# Altium PCB Board3_V2_Layout.PcbDoc
Units mil, origin at the board's own origin, x right, y up, seen from the top; angles counter-clockwise.
Board outline 3000 x 3500 mil, 2 copper layers (Top Layer, Bottom Layer); 61 components, 47 nets, 278 pads, 71 vias.
Unrouted connection lines stored in the file: 1.
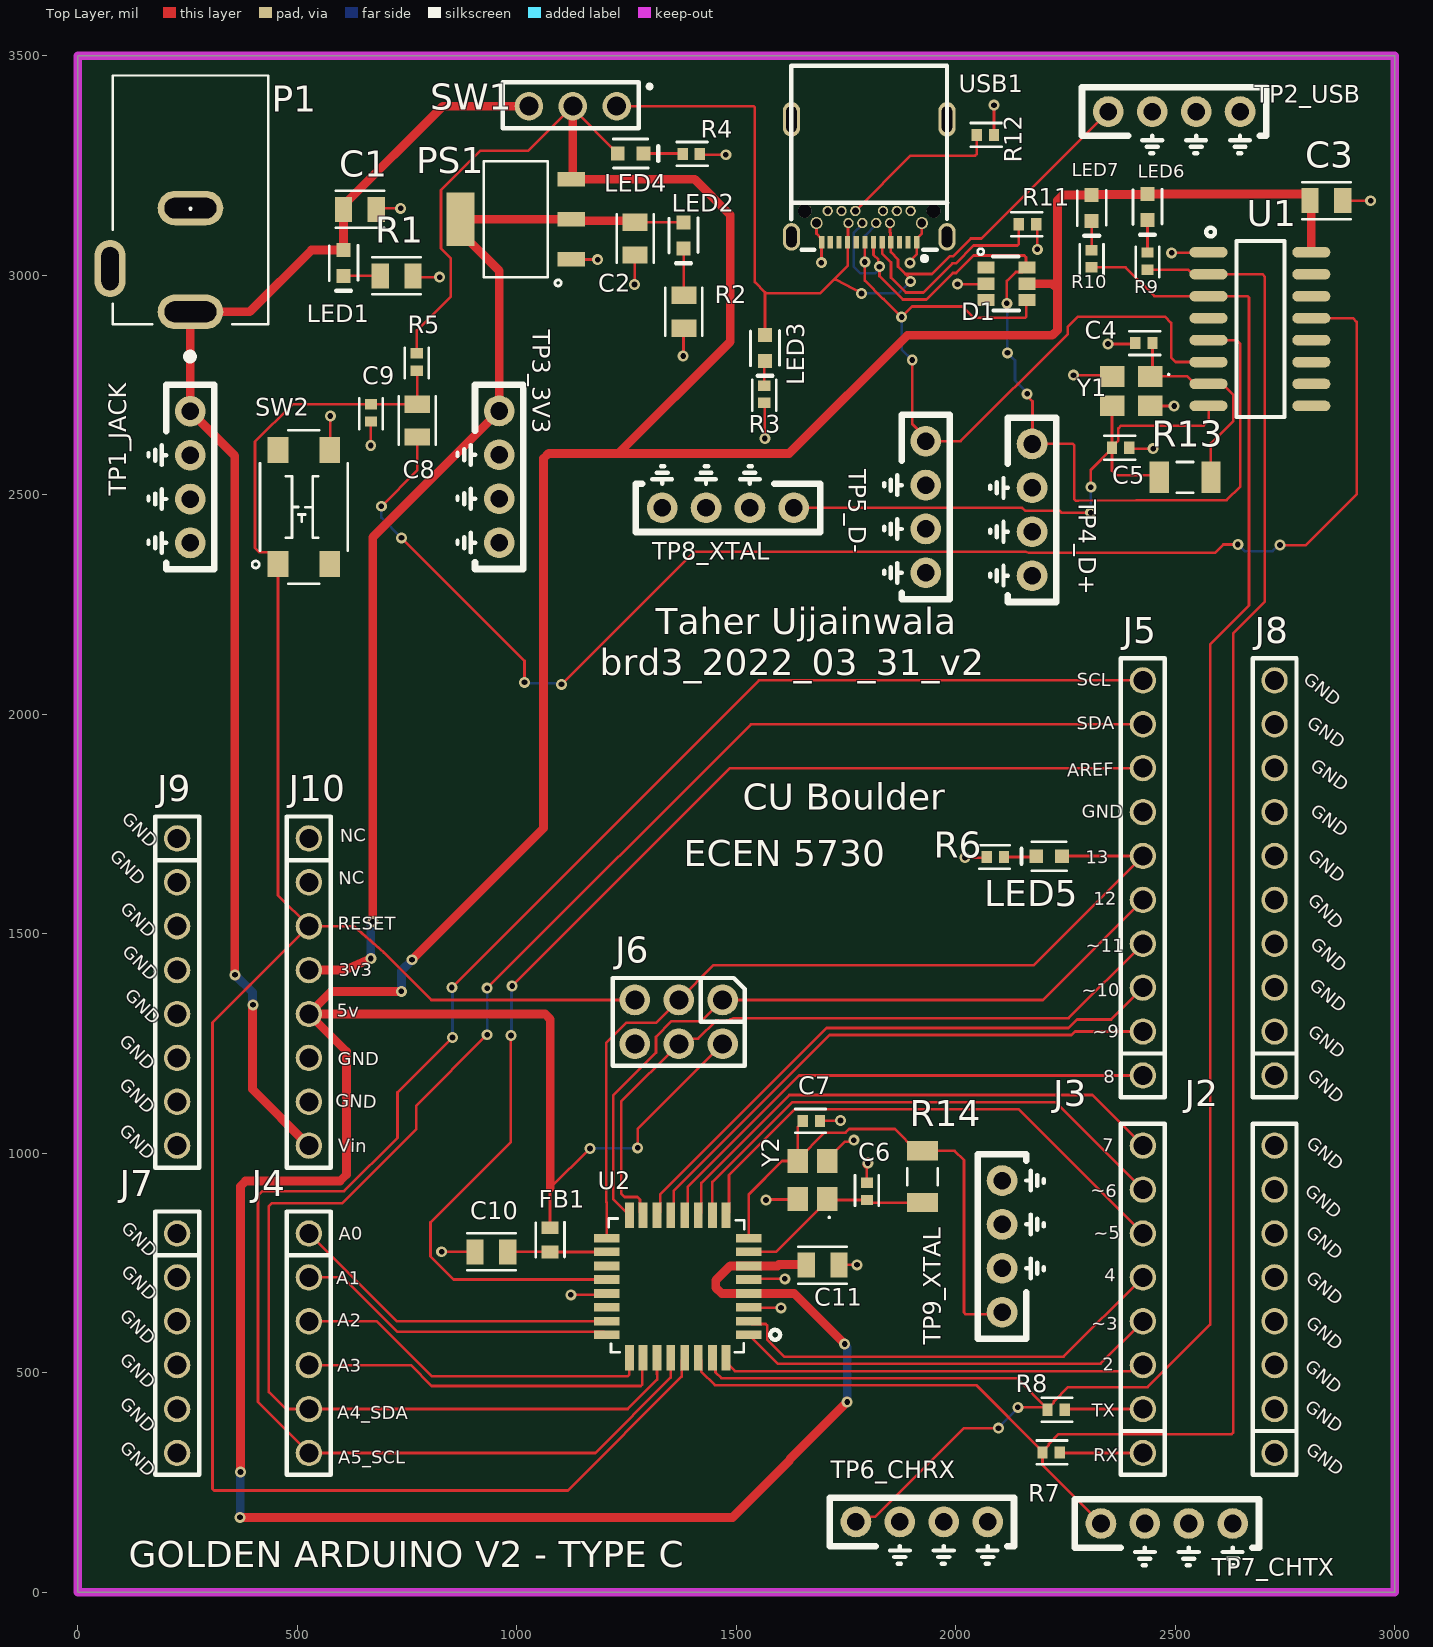
[diagram p0: Top Layer view]
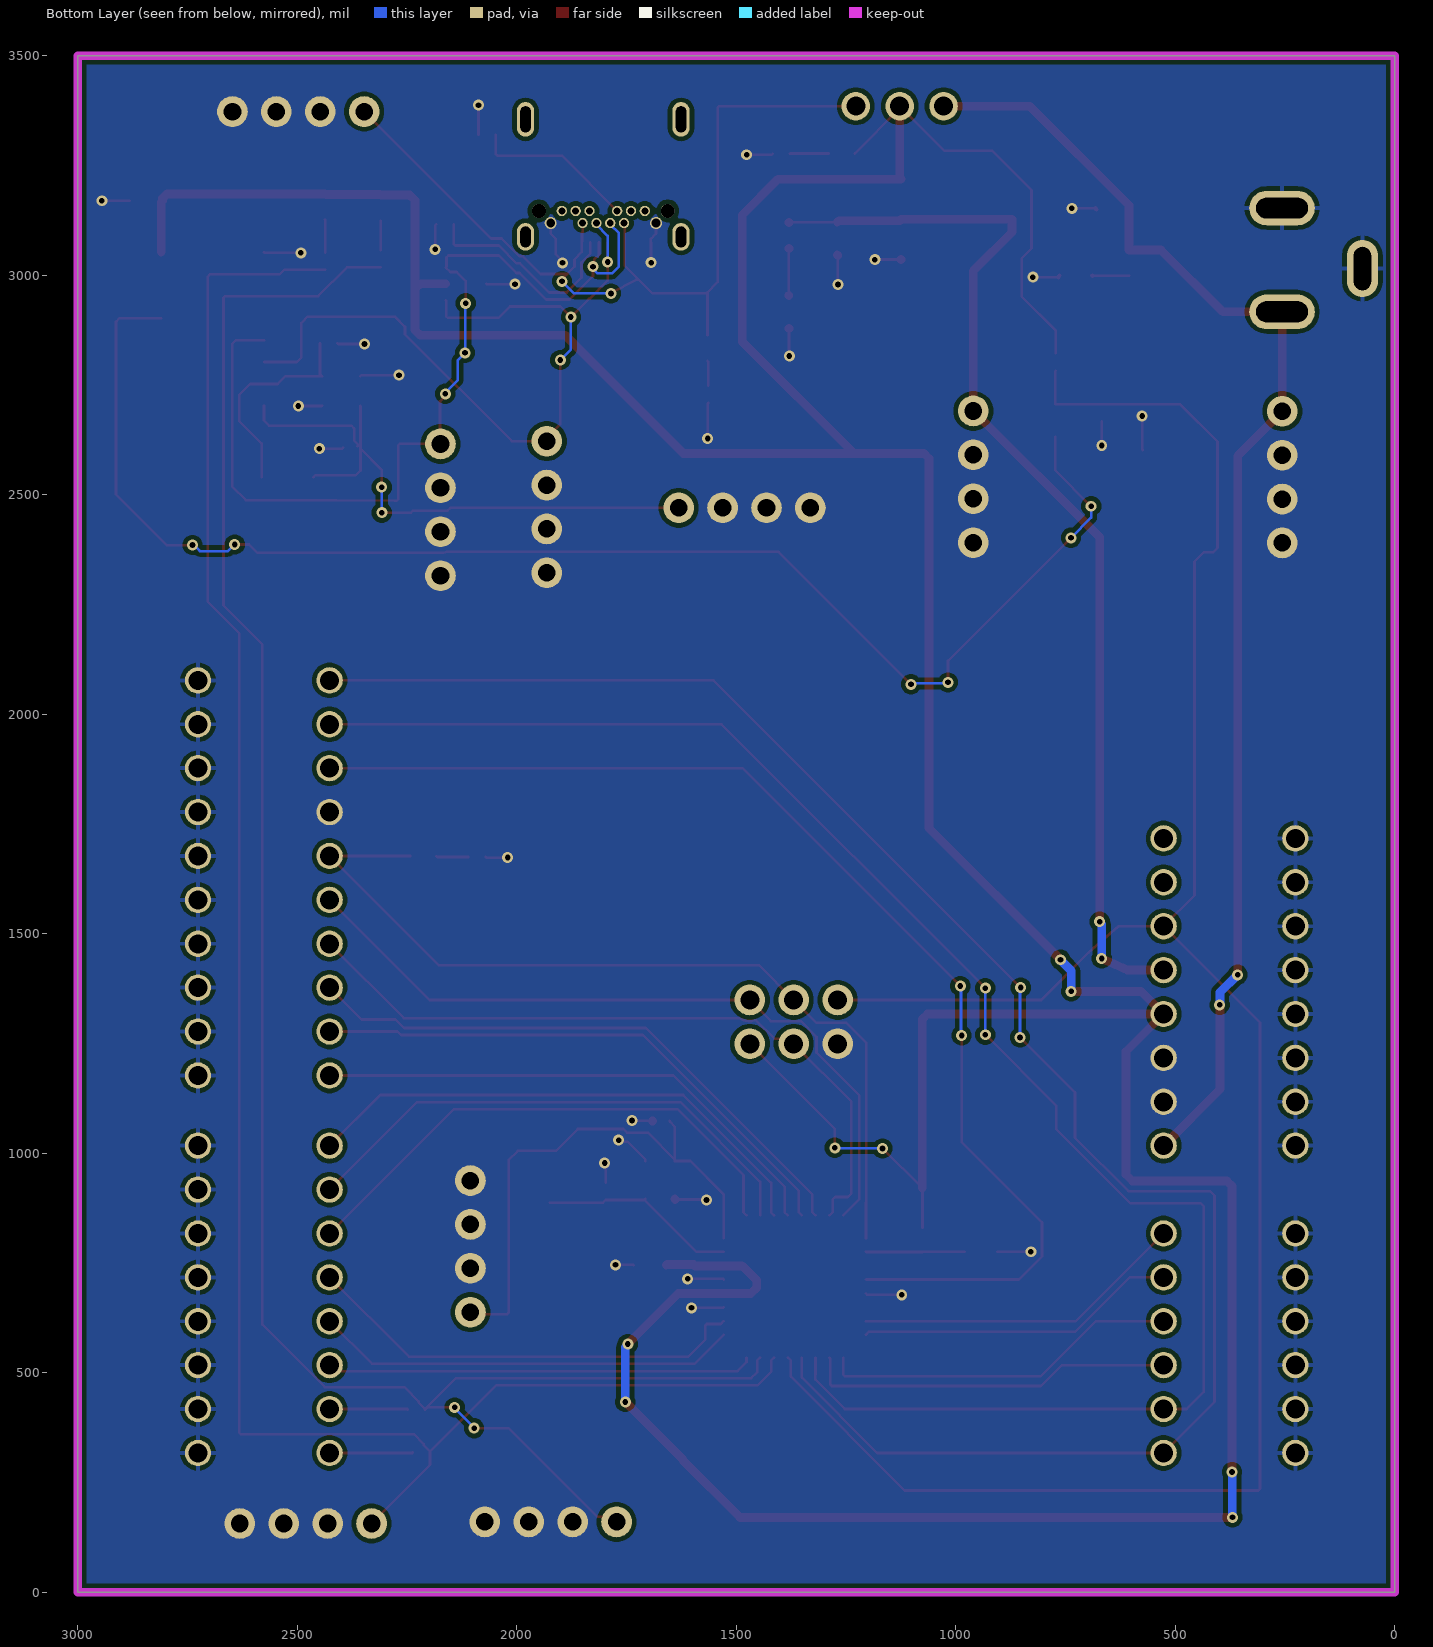
[diagram p1: Bottom Layer view, seen from below]
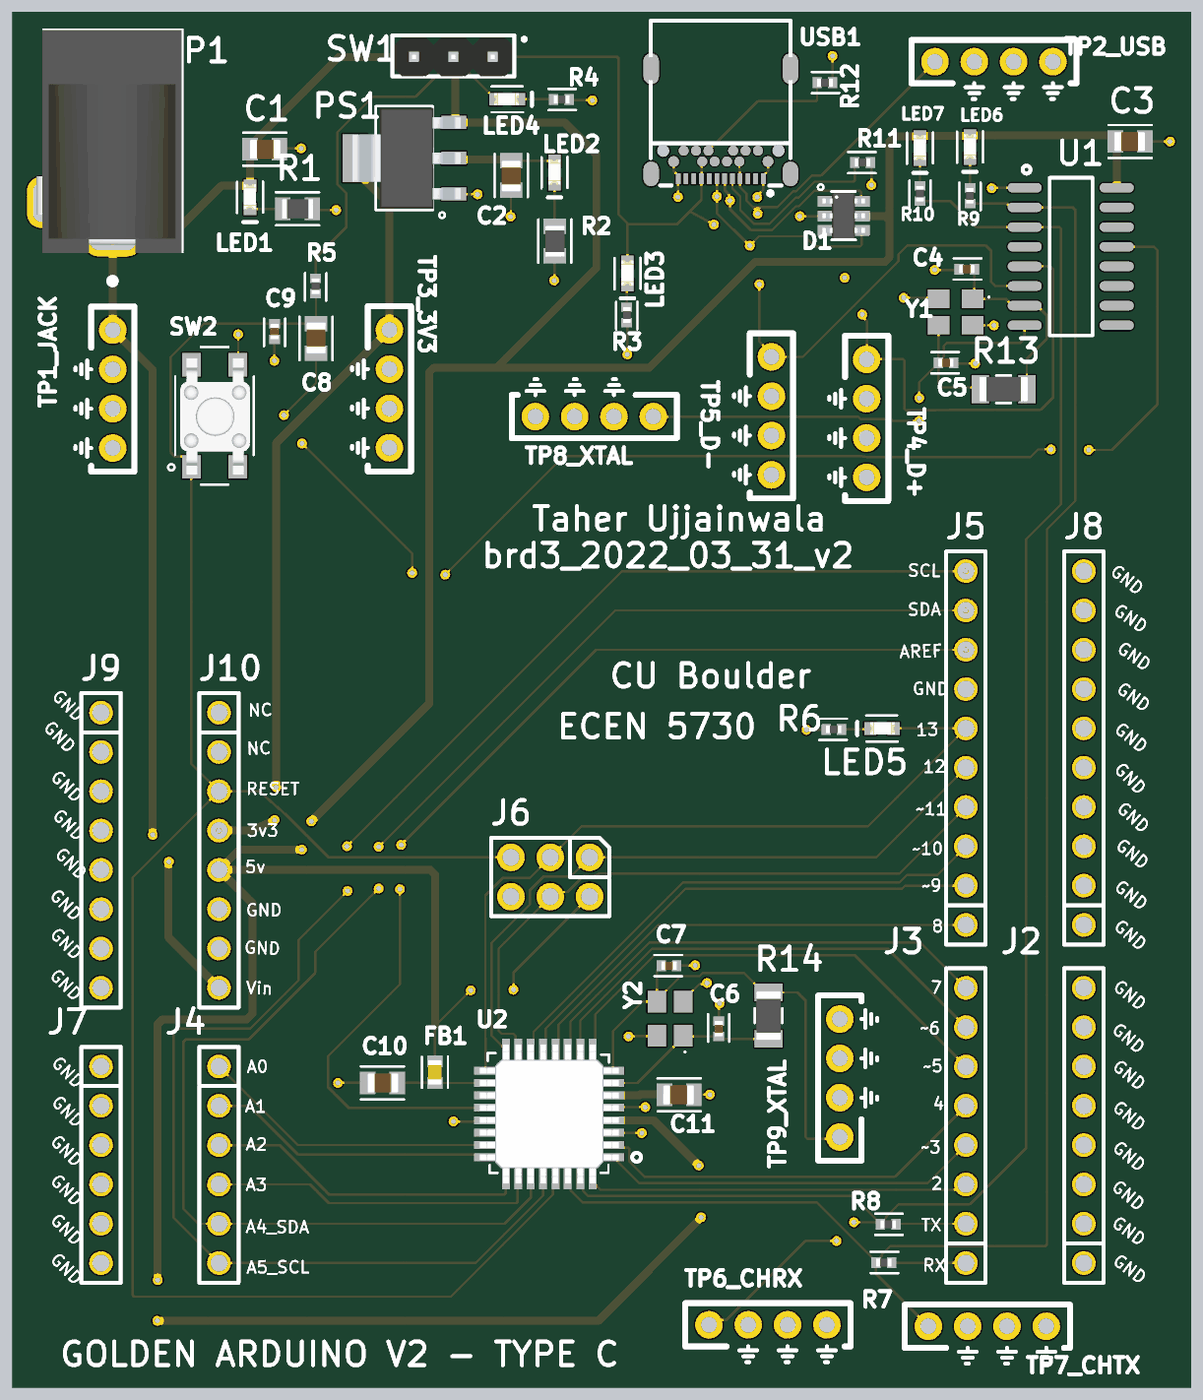
[diagram p2: 3D render of the assembled board from above, using the file's embedded part models]

## Layer stack, top to bottom
Top Solder: solder mask 0.4, Solder Resist, Dk 3.5
Top Layer: signal copper 1.4
Dielectric 1: dielectric 12.6, FR-4, Dk 4.8
Bottom Layer: signal copper 1.4
Bottom Solder: solder mask 0.4, Solder Resist, Dk 3.5

## Board outline
0,0 3000,0 3000,3500 0,3500

## Design rules (kind name [scope] priority, off if disabled: settings)
Clearance [All] p1: gap=10 ignorepadtopadclearanceinfootprint=FALSE except(0: Arc-Hole Track-Hole SMDPad-Hole THPad-Hole Via-Hole Fill-Hole Poly-Hole Region-Hole Text-Hole)
PlaneClearance [All] p1: clearance=10
PlaneConnect [All] p1: planeconnectstyle=Direct reliefexpansion=20 reliefentries=4 reliefconductorwidth=10 reliefairgap=10
PolygonConnect [All] p1: connectstyle=Direct reliefconductorwidth=10 reliefentries=4 polygonreliefangle="90 Angle" airgapwidth=10
RoutingVias [All] p1: holewidth=13 width=25 viastyle="Through Hole" minholewidth=13 minwidth=25 maxholewidth=60 maxwidth=80
SolderMaskExpansion [All] p1: expansion=4 istentingtop=FALSE
UnRoutedNet [All] p1: checkbadconnections=TRUE
Width [All] p1: maxlimit=100 minlimit=6 preferedwidth=6 minimp=50.000000 maximp=50.000000 favimp=50.000000
Width "Schematic Width Constraint" [InNet('JACK_5V')] p2: maxlimit=20 minlimit=20 preferedwidth=20 minimp=50.000000 maximp=50.000000 favimp=50.000000
Width "Schematic width constraints" [InNet('USB_5V')] p3: maxlimit=20 minlimit=20 preferedwidth=20 minimp=50.000000 maximp=50.000000 favimp=50.000000
Width "Schematics Width Constraints" [InNet('VCC_5V')] p4: maxlimit=20 minlimit=20 preferedwidth=20 minimp=50.000000 maximp=50.000000 favimp=50.000000
27 further rules are at their usual default settings.

## Components (designator, comment, footprint, x,y, rotation, side; value= is the part's Value field where it differs from the comment)
C1 "22uF" 0805_Passive_Capaciitor 642.7,3150.36 r180 top
C2 "22uF" 0805_Passive_Capaciitor 1269.76,3083.62 r90 top
C3 "22uF" 0805_Passive_Capaciitor 2844.25,3169.97 r0 top
C4 "22pF" 0402_Passive_Capacitor 2428.64,2845.58 r0 top
C5 "22pF" 0402_Passive_Capacitor 2375.66,2607.18 r180 top
C6 "22pF" 0402_Passive_Capacitor 1797.52,913.21 r90 top
C7 "22pF" 0402_Passive_Capacitor 1671.08,1073.7 r180 top
C8 "22uF" 0805_Passive_Capaciitor 773.21,2668.97 r270 top
C9 "1uF" 0402_Passive_Capacitor 667.71,2686.49 r270 top
C10 "22uF" 0805_Passive_Capaciitor 942.14,775.38 r180 top
C11 "22uF" 0805_Passive_Capaciitor 1696.84,745.04 r0 top
D1 "SRV05-4-P-T7" TVS 2114.91,2980.83 r0 top value="TVS DIODE 5.5V 6TSOP"
FB1 "FB_10uH_0603" 0603_PASSIVE_Capacitor 1075.81,802.66 r270 top
J2 "PPTC081LFBN-RC" 8_PIN_ARDUINO_100MIL 2726.35,317.18 r90 top locked value=Female
J3 "PPTC081LFBN-RC" 8_PIN_ARDUINO_100MIL 2426.35,317.18 r90 top locked value=Female
J4 "PPTC061LFBN-RC" 6_PIN_ARDUINO_100mil 526.35,817.18 r270 top locked value=Female
J5 "PPTC101LFBN-RC" 10_PIN_ARDUINO_100MIL 2426.35,1177.18 r90 top locked value=Female
J6 "NRPN032PAEN-RC" ICSP 1469.06,1349.16 r270 top
J7 "PPTC061LFBN-RC" 6_PIN_ARDUINO_100mil 226.35,817.18 r270 top locked value=Female
J8 "PPTC101LFBN-RC" 10_PIN_ARDUINO_100MIL 2726.35,1177.18 r90 top locked value=Female
J9 "PPTC081LFBN-RC" 8_PIN_ARDUINO_100MIL 226.35,1717.18 r270 top locked value=Female
J10 "PPTC081LFBN-RC" 8_PIN_ARDUINO_100MIL 526.35,1717.18 r270 top locked value=Female
LED1 "KT-0603R" LED_0603 605.37,3028.14 r270 top value=Red
LED2 "KT-0603R" LED_0603 1379.81,3090.84 r270 top value=Green
LED3 "KT-0603R" LED_0603 1565.55,2834.16 r270 top value=Red
LED4 "KT-0603R" LED_0603 1259.43,3277.39 r0 top value=Red
LED5 "KT-0603R" LED_0603 2212.81,1676.69 r180 top value=Red
LED6 "KT-0603R" LED_0603 2436.74,3155.82 r270 top value=Red
LED7 "KT-0603R" LED_0603 2309.53,3153.24 r270 top value=Red
P1 "Power Jack" Power_Jack 256.61,2916.9 r90 top value="CONN PWR JACK 2X5.5MM SOLDER"
PS1 "AMS1117-3.3" LDO 997.9,3127.59 r90 top value="IC REG LINEAR 3.3V 800MA SOT223"
R1 "1k" 0805_Passive_Resistor 726.13,2998.74 r0 top value="1K Ohm"
R2 "1k" 0805_Passive_Resistor 1380.63,2916.89 r270 top value="1K Ohm"
R3 "1k" 0402_Passive_Resistor 1563.8,2728.97 r270 top value="1K Ohm"
R4 "1k" 0402_Passive_Resistor 1397.48,3276.68 r0 top value="1K Ohm"
R5 "10k" 0402_Passive_Resistor 772.16,2802.33 r270 top value=10KOhm
R6 "1k" 0402_Passive_Resistor 2090.33,1674.74 r180 top value="1K Ohm"
R7 "1k" 0402_Passive_Resistor 2217.29,318.64 r0 top value="1K Ohm"
R8 "1k" 0402_Passive_Resistor 2228.64,415.57 r0 top value="1K Ohm"
R9 "1k" 0402_Passive_Resistor 2436.74,3032.17 r270 top value="1K Ohm"
R10 "1k" 0402_Passive_Resistor 2309.53,3037.72 r270 top value="1K Ohm"
R11 "10k" 0402_Passive_Resistor 2163.63,3116.29 r180 top value=10KOhm
R12 "10k" 0402_Passive_Resistor 2067.58,3319.84 r0 top value=10KOhm
R13 "10k" 1206_Passive_Resitor 2522.33,2539.75 r180 top value=10KOhm
R14 "10k" 1206_Passive_Resitor 1924.18,946.53 r90 top value=10KOhm
SW1 "PREC003SAAN-RC" 3_PIN_100mil 1227.63,3385.2 r180 top value="CONN HEADER VERT 3POS 2.54MM"
SW2 "TL3305AF160QG" Switch_JLC 515.02,2472.16 r90 top
TP1_JACK "TP_5V" TP10x_Probe 256.12,2540.31 r270 top (schematic designator TP1)
TP2_USB "10x Probe TP" TP10x_Probe 2497.69,3373 r0 top (schematic designator TP2)
TP3_3V3 "10x Probe TP" TP10x_Probe 959.89,2540.9 r270 top (schematic designator TP3)
TP4_D+ "10x Probe TP" TP10x_Probe 2173.83,2465.74 r270 top (schematic designator TP4)
TP5_D- "10x Probe TP" TP10x_Probe 1931.71,2472.12 r270 top (schematic designator TP5)
TP6_CHRX "10x Probe TP" TP10x_Probe 1922.71,160.02 r0 top (schematic designator TP6)
TP7_CHTX "10x Probe TP" TP10x_Probe 2480.86,156.42 r0 top (schematic designator TP7)
TP8_XTAL "10x Probe TP" TP10x_Probe 1481.13,2470.18 r180 top (schematic designator TP8)
TP9_XTAL "10x Probe TP" TP10x_Probe 2105.57,787.77 r90 top (schematic designator TP9)
U1 "CH340G" "USB to serial" 2693,2877.42 r270 top value="USB to Serial"
U2 "ATMEGA328P-ANR" ATMega328P 1364.65,696.33 r0 top value="IC MCU 8BIT 32KB FLASH 32TQFP"
USB1 "USB_TypeC" TYPE-C-TH_USB31-TYPEC-33141-2FS 1802.85,3215.33 r180 top
Y1 "X322512MSB4SI" "Crystal resonator" 2399.93,2734.2 r180 top value=12MHz
Y2 "X322516MLB4SI" "Crystal resonator" 1671.76,938.93 r90 top value=16MHz

## Footprints (in the part's own frame and the unit in brackets; to place one, negate y for a bottom-side part, rotate by r counter-clockwise, add the part's x,y. Pads: shape width x height; smd on the part's side, far side on the other; paste and mask are expansions set on the pad)
3_PIN_100mil [mm]
  round 1.65 hole 1.1: 1(0,0) 2(2.54,0) 3(5.08,0)
  silkscreen extent -2,-1.4 6.6,1.27, body extent -1.14,-1.27 6.48,1.27, height 8.38
6_PIN_ARDUINO_100mil [mil]
  round 60 hole 43.31: 1(0,0) 2(100,0) 3(200,0) 4(300,0) 5(400,0) 6(500,0)
  silkscreen extent -50,-50 550,50
8_PIN_ARDUINO_100MIL [mil]
  round 60 hole 43.31: 1(0,0) 2(100,0) 3(200,0) 4(300,0) 5(400,0) 6(500,0) 7(600,0) 8(700,0)
  silkscreen extent -50,-50 750,50
10_PIN_ARDUINO_100MIL [mil]
  round 60 hole 43.31: 1(0,0) 2(100,0) 3(200,0) 4(300,0) 5(400,0) 6(500,0) 7(600,0) 8(700,0) 9(800,0) 10(900,0)
  silkscreen extent -50,-50 950,50
0402_Passive_Capacitor [mm] "Reference: https://www.worthingtonassembly.com/perfect-0402-footprint"
  rect 0.6x0.7 smd mask+0: 1(-0.5,0) 2(0.5,0)
  silkscreen extent -0.84,-0.69 0.94,0.69, body extent -0.5,-0.27 0.5,0.28, height 0.5
0402_Passive_Resistor [mm] "Reference: https://www.worthingtonassembly.com/perfect-0402-footprint"
  rect 0.6x0.7 smd mask+0: 1(-0.5,0) 2(0.5,0)
  silkscreen extent -0.84,-0.69 0.94,0.69, body extent -0.49,-0.25 0.51,0.25, height 0.4
0603_PASSIVE_Capacitor [mm] "Reference: http://livepartlibrary.com/fpdimensions.html"
  rect 0.75x1 smd mask+0: 1(-0.7,0) 2(0.7,0)
  silkscreen extent -1.02,-0.84 1.02,0.84, body extent -0.79,-0.45 0.81,0.45, height 0.79
0805_Passive_Capaciitor [mm] "Reference: http://livepartlibrary.com/fpdimensions.html"
  rect 1x1.45 smd mask+0: 1(-0.95,0) 2(0.95,0)
  silkscreen extent -1.4,-1.07 1.4,1.07, body extent -1.04,-0.62 0.96,0.63, height 1.4
0805_Passive_Resistor [mm] "Reference: http://livepartlibrary.com/fpdimensions.html"
  rect 1x1.45 smd mask+0: 1(-0.95,0) 2(0.95,0)
  silkscreen extent -1.4,-1.07 1.4,1.07, body extent -0.98,-0.62 1.02,0.63, height 0.5
1206_Passive_Resitor [mil]
  rect 44x71 smd: 1(-59,0) 2(59,0)
  silkscreen extent -19,-35 19,35, body extent -61,-31 61,31, height 26
ATMega328P [mil]
  rect 58x20 smd mask+1: 1(163.93,-110) 2(163.93,-79) 3(163.93,-47) 4(163.93,-16) 5(163.93,16) 6(163.93,47) 7(163.93,79) 8(163.93,110) 17(-160.07,110) 18(-160.07,79) 19(-160.07,47) 20(-160.07,16) 21(-160.07,-16) 22(-160.07,-47) 23(-160.07,-79) 24(-160.07,-110)
  rect 20x58 smd mask+1: 9(111.93,162) 10(80.93,162) 11(48.93,162) 12(17.93,162) 13(-14.07,162) 14(-45.07,162) 15(-77.07,162) 16(-108.07,162) 25(-108.07,-162) 26(-77.07,-162) 27(-45.07,-162) 28(-14.07,-162) 29(17.93,-162) 30(48.93,-162) 31(80.93,-162) 32(111.93,-162)
  silkscreen extent -155,-150 235,155, body extent -175,-177 179,177, height 46
"Crystal resonator" [mil]
  rect 55.11x47.24 smd: 1(-43.3,-35.43) 2(43.31,-35.43) 3(43.32,31.5) 4(-43.3,31.5)
  silkscreen extent -87,-42 -83,-38, body extent -65,-47 65,47, height 31
ICSP [mil]
  round 70 hole 43.31: 1(0,0) 2(0,-100) 3(0,-200) 4(100,0) 5(100,-100) 6(100,-200)
  silkscreen extent -50,-250 150,50
LDO [mil]
  rect 33x63 smd: 1(-91,-126) 2(0,-126) 3(91,-126)
  rect 122x63 smd: 4(0,126)
  silkscreen extent -152,-103 132,73, body extent -128,-144 128,132, height 73
LED_0603 [mm]
  rect 0.8x0.8 smd: 1(-0.75,0) 2(0.75,0)
  silkscreen extent -1.02,-0.84 1.6,0.84, body extent -0.84,-0.41 0.76,0.39, height 0.55
Power_Jack [mm]
  oval 2x3.8 hole 1.2 slot 3 at 90 deg: 1(0,0) 2(6,0)
  oval 3.3x1.8 hole 1 slot 2.5 at 0 deg: 3(2.5,4.65)
  silkscreen extent -2.79,-4.5 13.68,4.5, body extent -0.76,-4.45 13.64,4.95, height 11.49
Switch_JLC [mm]
  rect 1.5x1.2 smd: 1(-3.3,1.5) 2(3.3,1.5) 3(-3.3,-1.5) 4(3.3,-1.5)
  silkscreen extent -4.44,-2.54 4.45,3, body extent -3.8,-2.29 3.7,2.21, height 3.7
TP10x_Probe [mil] "Small Probs footprint"
  round 70 hole 40: 1(-150,0) 2(-50,0) 2(50,0) 2(150,0)
  silkscreen extent -210,-95 210,55
TVS [mm]
  rect 1x0.7 smd mask+0.025: 1(-1.162,0.95) 2(-1.162,0) 3(-1.162,-0.95) 4(1.2,-0.95) 5(1.2,0) 6(1.2,0.95)
  silkscreen extent -1.65,-1.55 0.76,2.03, body extent -1.37,-1.44 1.38,1.46, height 1.1
TYPE-C-TH_USB31-TYPEC-33141-2FS [mm]
  rect 0.3x0.7 smd: A1(-2.75,3.555) A2(-2.25,3.555) A3(-1.75,3.555) A4(-1.25,3.555) A5(-0.75,3.555) A6(-0.25,3.555) A7(0.25,3.555) A8(0.75,3.555) A9(1.25,3.555) A10(1.75,3.555) A11(2.25,3.555) A12(2.75,3.555)
  round 0.7 hole 0.5: B1(3.05,2.445) B12(-3.05,2.445)
  round 0.6 hole 0.4: B2(2.4,1.745) B3(1.6,1.745) B4(1.2,2.445) B5(0.8,1.745) B6(0.4,2.445) B7(-0.4,2.445) B8(-0.8,1.745) B9(-1.2,2.445) B10(-1.6,1.745) B11(-2.4,1.745)
  oval 1x1.6 hole 0.6 slot 1.2 at 90 deg: EH(-4.5,3.245) EH(4.5,3.245)
  oval 1x2 hole 0.6 slot 1.5 at 90 deg: EH(-4.5,-3.555) EH(4.5,-3.555)
  round 0.8 hole 0.8 unplated: ""(-3.725,1.745) ""(3.725,1.745)
  silkscreen extent -4.52,-6.65 4.52,4.64
"USB to serial" [mil]
  oval 24x86.61 smd: 1(-175,-117) 2(-125,-117) 3(-75,-117) 4(-25,-117) 5(25,-117) 6(75,-117) 7(125,-117) 8(175,-117) 9(175,117) 10(125,117) 11(75,117) 12(25,117) 13(-25,117) 14(-75,117) 15(-125,117) 16(-175,117)
  silkscreen extent -231,-122 201,56

## Part data
C1 C2 C3 C8 C10 C11: library part C_22uF_0805, "MULTILAYER CERAMIC CAPACITORS MLCC - SMD/SMT 22UF 25V 0805 ROHS", LCSC Part#=C45783, MFR Part #=CL21A226MAQNNNE, Datasheet=https://datasheet.lcsc.com/szlcsc/Samsung-Electro-Mechanics-CL21A226MAQNNNE_C45783.pdf, Type=Basic
C4 C5 C6 C7: library part C_22pF_0402, "MULTILAYER CERAMIC CAPACITORS MLCC - SMD/SMT 22PF 50V 0402 ROHS", LCSC Part#=C1555, MFR Part #=0402CG220J500NT, Datasheet=https://datasheet.lcsc.com/szlcsc/Guangdong-Fenghua-Advanced-Tech-0402CG220J500NT_C1555.pdf, Type=Basic
C9: library part C_1uF_0402, "MULTILAYER CERAMIC CAPACITORS MLCC - SMD/SMT 1UF 25V 0402 ROHS", LCSC Part#=C52923, MFR Part #=CL05A105KA5NQNC, Datasheet=https://datasheet.lcsc.com/szlcsc/Samsung-Electro-Mechanics-CL05A105KA5NQNC_C52923.pdf, Type=Basic
D1: library part D_TVS_Diode, "TVS SOT-23-6 ROHS", LCSC Part#=C85364, Datasheet=https://datasheet.lcsc.com/szlcsc/ProTek-Devices-SRV05-4-P-T7_C85364.pdf, MFR Part #=SRV05-4-P-T7, Type=Basic
FB1: "10 uH, 30 Q, 1.85 Ohm Series Resistance, 17MHz Self Resonant Frequency,Inductor , SMD 0603, 3 Amps rated current", LCSC Part#=C1035, MFR Part #=SDFL1608S100KTF, Datasheet=https://datasheet.lcsc.com/szlcsc/Sunlord-SDFL1608S100KTF_C1035.pdf, Type=Basic
J2 J3 J9 J10: library part JF_8_PIN_FEMALE_ARDUINO, "8 Position Header Connector 0.100\" (2.54mm) Through Hole Tin", LCSC Part#=C27438, Digikey Link=https://www.digikey.com/product-detail/en/PPTC081LFBN-RC/S7006-ND/810147/?itemSeq=304982354, Digikey Part=S7006-ND, Type=Extended
J4 J7: library part JF_6_PIN_FEMALE_ARDUINO, "6 Position Header Connector 0.100\" (2.54mm) Through Hole Tin", LCSC Part#=C40877, Digikey Link=https://www.digikey.com/product-detail/en/PPTC061LFBN-RC/S7004-ND/810145/?itemSeq=304982353, Digikey Part=S7004-ND, Type=Extended
J5 J8: library part JF_10_PIN_FEMALE_ARDUINO, "10 Position Header Connector 0.100\" (2.54mm) Through Hole Tin", LCSC Part#=C225507, Digikey Link=https://www.digikey.com/product-detail/en/PPTC101LFBN-RC/S7008-ND/810149/?itemSeq=304982352, Digikey Part=S7008-ND, Type=Extended
J6: library part J_ICSP, "Connector Header Through Hole 6 position 0.079\" (2.00mm)", LCSC Part#=C124384, Digikey Link=https://www.digikey.com/product-detail/en/NRPN032PAEN-RC/S5801-03-ND/804955/?itemSeq=304982355, Digikey Part=S5801-03-ND, Type=Extended
LED1 LED3 LED4 LED5 LED6 LED7: library part LED_RED_0603, "LIGHT EMITTING DIODES (LED) RED 520~625NM 90~100MCD@20MA TOP VIEW 0603 ROHS", LCSC Part#=C2286, Datasheet=https://datasheet.lcsc.com/szlcsc/Everlight-Elec-19-217-BHC-ZL1M2RY-3T_C72041.pdf, MFR Part #=KT-0603R, Type=Basic
LED2: library part LED_GREEN_0603, "LIGHT EMITTING DIODES (LED) GREEN 520~535NM 112~258MCD@20MA TOP VIEW 0603 ROHS", LCSC Part#=C72043, MFR Part #=19-217/GHC-YR1S2/3T, Type=Basic
P1: library part "P_Power Jack", "Power Barrel Connector Jack 2.10mm ID (0.083\"), 5.50mm OD (0.217\") Through Hole, Right Angle", LCSC Part#=C136744, Digikey Link=https://www.digikey.com/product-detail/en/PJ-102A/CP-102A-ND/275425/?itemSeq=304982367, Digikey Part=CP-102A-ND, Type=Extended
PS1: library part PS_AMS_LDO_3v3, "LOW DROPOUT REGULATORS(LDO) POSITIVE FIXED 1.3V @ 800MA 15V 3.3V 1A SOT-223 ROHS", LCSC Part#=C6186, MFR Part #=AMS1117-3.3, Type=Basic
R1 R2: library part R_1K_0805, "CHIP RESISTOR - SURFACE MOUNT 1KOHMS ±1% 1/8W 0805 ROHS", LCSC Part#=C17513, MFR Part #=0805W8F1001T5E, Type=Basic
R3 R4 R6 R7 R8 R9 R10: library part R_1K_0402, "1 kOhms chip resistor SURFACE MOUNT 1KOHMS ±1% 1/16W 0402 ROHS", LCSC Part#=C11702, MFR Part #=0402WGF1001TCE, Datasheet=https://datasheet.lcsc.com/szlcsc/Uniroyal-Elec-0402WGF1001TCE_C11702.pdf, Type=Basic
R5 R11 R12: library part R_10KOhm_0402, "CHIP RESISTOR - SURFACE MOUNT 10KOHMS ±1% 1/16W 0402 ROHS", LCSC Part#=C25744, MFR Part #=0402WGF1002TCE, Datasheet=https://datasheet.lcsc.com/szlcsc/Uniroyal-Elec-0402WGF1002TCE_C25744.pdf, Type=Basic
R13 R14: library part R_10KOhm_1206, "10 kOhms ±5% 0.25W, 1/4W Chip Resistor 1206 (3216 Metric) Automotive AEC-Q200 Thick Film", LCSC Part#=C17902, Digikey Link=https://www.digikey.com/product-detail/en/RMCF1206JT300R/RMCF1206JT300RCT-ND/1942776/?itemSeq=304982374, Digikey Part=RMCF1206JT300RCT-ND, Type=Basic
SW1: library part SW_3Pin_100mil_Switch, "Connector Header Through Hole 3 position 0.100\" (2.54mm)", LCSC Part#=C429954, Digikey Link=https://www.digikey.com/product-detail/en/PREC003SAAN-RC/S1012EC-03-ND/2774851/?itemSeq=304982371, Digikey Part=S1012EC-03-ND, Type=Extended
SW2: library part SW_Push_Button_JLC, "Tactile Switch SPST-NO Top Actuated Surface Mount", LCSC Part#=C174049, MFR Part #=C174049, Type=Extended
TP1_JACK TP2_USB TP3_3V3 TP4_D+ TP5_D- TP6_CHRX TP7_CHTX TP8_XTAL TP9_XTAL: library part TP_10x_Probe, "Test Point 300 mil centers"
U1: library part U_USBtoSerial, "Transceiver USB 2.0 2Mbps SOP-16_150mil USB ICs RoHS", LCSC Part#=C14267, Datasheet=https://datasheet.lcsc.com/lcsc/2008191806_WCH-Jiangsu-Qin-Heng-CH340G_C14267.pdf, MFR Part #=CH340G, Type=Basic
U2: library part U_ATMega328P, "AVR AVR® ATmega Microcontroller IC 8-Bit 20MHz 32KB (16K x 16) FLASH 32-TQFP (7x7)", LCSC Part#=C14877, MFR Part #=ATMEGA328P-AU, Digikey Link=https://www.digikey.com/product-detail/en/ATMEGA328P-ANR/ATMEGA328P-ANRCT-ND/2774230/?itemSeq=304982365, Type=Basic
USB1: library part USB_TypeC3.1
Y1: library part X_12MHz_Res, "SMD Crystal Resonators 12MHz ±10ppm SMD-3225_4P RoHS", LCSC Part#=C9002, Datasheet=https://datasheet.lcsc.com/szlcsc/Yangxing-Tech-X322512MSB4SI_C9002.pdf, MFR Part #=X322512MSB4SI, Type=Basic
Y2: library part X_16Mhz_Res, "±10ppm 16000000Hz -40℃~85℃ 贴片无源晶振 60Ω 9pF SMD3225-4P Crystals ROHS", LCSC Part#=C13738, MFR Part #=X322516MLB4SI, Type=Basic

## Via types
v1: diameter 25, hole 13, Top Layer to Bottom Layer, 71 vias

## Nets (pads, with @x,y where several pads share a name; then routed paths per layer and width w, separated by ;. In a path a pad name is that pad's centre, name@x,y a point inside that pad or via, vN(x,y) a via of type N, cw(c..) or ccw(c..) an arc to the next point about the centre after c; other vN are vias at no path point)
3V3: C2.2 J10.4 LED2.1 PS1.2 PS1.4 TP3_3V3.1 | length 2499.2
  Top Layer w6: C2.2@1270.08,3120.69 LED2.1@1379.48,3120.69
  Top Layer w20: v1(526.35,1417.18) 600.2,1417.18 608.49,1417.18 v1(667.55,1443.68) ; v1(671.96,1527.49) 671.96,2402.97 TP3_3V3.1 959.89,3010.1 871.9,3098.09 PS1.4 PS1.2 1127.19,3124.31 1266.47,3124.31 C2.2 C2.2@1270.08,3120.69 ; LED2.1@1379.48,3120.69 LED2.1
  Bottom Layer w20: v1(667.55,1443.68) 667.55,1521.73 671.96,1526.14 v1(671.96,1527.49)
A0: J4.1 U2.23 | length 761
  Top Layer w6: J4.1 726.19,617.33 U2.23
A1: J4.2 U2.24 | length 732.4
  Top Layer w6: J4.2 603.72,717.18 727.57,593.33 1197.58,593.33 U2.24
A2: J4.3 U2.25 | length 822.5
  Top Layer w6: J4.3 681.09,617.18 806.61,491.66 1252.44,491.66 1255.96,495.17 1255.96,533.71 U2.25
A3: J4.4 U2.26 | length 842.6
  Top Layer w6: J4.4 758.46,517.18 806.01,469.63 1282.34,469.63 1285.85,473.15 1285.85,532.61 U2.26
A4_SDA: J4.5 J5.9 U2.27 | length 3940.9
  Top Layer w6: v1(932.5,1269.91) 771.09,1108.5 771.09,1055.36 601.63,885.9 441.64,885.9 435.24,879.5 435.24,456.05 474.12,417.18 J4.5 1252.51,417.18 1319.67,484.34 1319.67,496.23 1319.58,496.33 U2.27 ; v1(932.5,1375.98) 1533.69,1977.18 v1(2426.35,1977.18)
  Bottom Layer w6: v1(932.5,1269.91) v1(932.5,1375.98)
A5_SCL: J4.6 J5.10 U2.28 | length 4210.7
  Top Layer w6: v1(852,1377.33) 1551.85,2077.18 v1(2426.35,2077.18) ; v1@852.49,1259.84 853.5,1260.86 v1(853.5,1263.82) 728.28,1138.59 728.28,1035.17 606.68,913.58 420.81,913.58 410.43,903.2 410.43,433.1 J4.6 1179.03,317.18 1350.58,488.72 U2.28
  Bottom Layer w6: v1(852,1377.33) 853.5,1375.82 v1(853.5,1263.82)
AREF: J5.8 U2.20 | length 2758.4
  Top Layer w6: v1(986.63,1268.2) 986.63,1025.79 803.37,842.53 803.37,764.95 855.99,712.33 U2.20 ; v1(989.57,1380.9) 1485.85,1877.18 v1(2426.35,1877.18)
  Bottom Layer w6: v1(986.63,1268.2) 988.1,1269.67 988.1,1379.42 v1(989.57,1380.9)
CH340_RX: R8.1 R10.2 TP6_CHRX.1 U1.3 U2.31 | length 4590.6
  Top Layer w6: U2.31 1452.58,527.33 1452.58,500.95 1466.03,487.49 2139,487.49 2208.96,417.54 2223.52,432.1 2223.52,434.73 2255.83,467.05 2437.03,467.05 2579.59,609.6 2579.59,2159.07 2668.17,2247.66 2668.17,2948.91 2664.65,2952.42 U1.3 2452.83,2952.42 2387.21,3018.04 R10.2 ; TP6_CHRX.1 1784.59,171.9 1816.71,171.9 2018.38,373.57 v1(2097.2,373.57) ; v1(2141.51,420.96) 2203.57,420.96 R8.1
  Bottom Layer w6: v1(2097.2,373.57) 2097.2,375.11 2141.51,419.42 v1(2141.51,420.96)
CH340_TX: R7.1 R9.2 TP7_CHTX.1 U1.2 U2.30 | length 4497.7
  Top Layer w6: U2.30 1420.58,527.33 1420.58,501.95 1451.03,471.49 2046.73,471.49 R7.1@2197.61,320.61 ; TP7_CHTX.1 2197.61,289.67 R7.1@2197.61,320.61 ; R9.2 2529.76,3012.49 2539.82,3002.42 U1.2 2698.41,3002.42 2704.35,2996.48 2704.35,2256.39 2632.61,2184.65 2632.61,364.16 2628.63,360.18 2234.54,360.18 2212.17,337.8 2212.17,335.16 R7.1@2197.61,320.61
D+: D1.6 TP4_D+.1 U1.5 USB1.A6 USB1.B6 | length 2153.7
  Top Layer w6: USB1.A6 1812.7,3046.64 1823.82,3035.52 1823.82,3022.23 v1(1826.37,3019.67) ; v1@1823.69,3016.99 1826.37,3014.31 1826.37,2998.03 1879.59,2944.81 1932.95,2944.81 1993.48,3005.34 2001.08,3005.34 2040.75,3045.01 2156.08,3045.01 2160.08,3041.01 2160.08,3020.3 D1.6 2151.53,3007.61 2137.09,3007.61 2116.44,2986.96 v1(2116.44,2936.07) ; v1(2162.79,2730.01) 2162.79,2724.87 2174.83,2712.83 2174.83,2616.74 TP4_D+.1 ; TP4_D+.1@2174.2,2616.11 2266.86,2616.11 2270.38,2612.6 2270.38,2489.7 2272.13,2487.94 2273.89,2486.18 2278.86,2486.18 2411.49,2487.24 cw(c2411.69,2461.74) 2411.6,2487.24 2617.03,2487.94 2648.31,2519.22 2648.31,2843.82 2639.71,2852.42 U1.5
  Bottom Layer w6: USB1.B6 1787.11,3115.47 1767.51,3095.87 1767.51,3019.7 1782.45,3004.77 1816.93,3004.77 1823.94,3011.77 1823.94,3017.24 v1(1826.37,3019.67) ; v1(2116.44,2936.07) 2117.16,2935.35 2117.16,2824.17 2134.89,2806.44 2134.89,2760.81 2162.79,2732.91 v1(2162.79,2730.01)
  other v1: 2117.89,2823.45
D-: D1.4 TP5_D-.1 U1.6 USB1.A7 USB1.B7 | length 1814.6
  Top Layer w6: USB1.A7 v1(1793.01,3030.27) 1793.01,2987.65 1834.36,2946.3 1835.35,2946.3 v1(1876.73,2904.92) 1900.62,2928.81 2015.86,2928.81 2041.53,2903.14 2157.25,2903.14 2160.77,2906.66 2160.77,2942.04 D1.4 ; v1(1900.93,2806.84) 1900.93,2660.83 1931.71,2630.05 TP5_D-.1 2011.2,2622.12 2254.76,2865.68 2254.76,2882.41 2278,2905.65 2476.35,2905.65 2490.66,2891.34 2490.66,2812.4 2500.63,2802.42 U1.6
  Bottom Layer w6: v1(1793.01,3030.27) 1793.01,3089.88 1818.61,3115.48 USB1.B7 ; v1(1876.73,2904.92) 1876.73,2831.03 v1(1900.93,2806.84)
DIO2: J3.3 U2.32 | length 974.2
  Top Layer w6: U2.32 1476.58,524.18 1497.26,503.49 2398.05,503.49 2411.73,517.18 J3.3
DIO3: J3.4 U2.1 | length 964.9
  Top Layer w6: U2.1 1594.22,520.68 2329.85,520.68 J3.4
DIO4: J3.5 U2.2 | length 1024.7
  Top Layer w6: U2.2 1535.02,610.89 1567.06,610.89 1570.58,607.37 1570.58,575.33 1609.22,536.68 2245.85,536.68 J3.5
DIO5: J3.6 U2.9 | length 1216.9
  Top Layer w6: U2.9 1483.58,865.33 1483.58,949.85 1634.2,1100.48 2143.05,1100.48 J3.6
DIO6: J3.7 U2.10 | length 1214.9
  Top Layer w6: U2.10 1445.58,934.48 1627.57,1116.48 2227.05,1116.48 J3.7
DIO7: J3.8 U2.11 | length 1213.2
  Top Layer w6: U2.11 1420.58,865.33 1420.58,932.11 1620.94,1132.48 2311.05,1132.48 J3.8
DIO8: J5.1 U2.12 | length 1210.1
  Top Layer w6: U2.12 1389.58,865.33 1389.58,923.74 1643.02,1177.18 J5.1
DIO9: J5.2 U2.13 | length 1278
  Top Layer w6: U2.13 1357.58,865.33 1357.58,914.36 1712.38,1269.16 2263.59,1269.16 2271.6,1277.18 J5.2
DIO10_SS: J5.3 U2.14 | length 1345.5
  Top Layer w6: U2.14 1326.58,865.33 1326.58,905.99 1705.75,1285.16 2256.96,1285.16 2276.53,1304.73 2353.9,1304.73 J5.3
DIO11_MOSI: J5.4 J6.5 U2.15 | length 1633.9
  Top Layer w6: U2.15 1280.58,865.33 1280.58,894.57 1274.81,900.33 1245.58,900.33 1237.7,908.2 1237.7,1117.81 J6.5 1380.94,1261.05 1413.06,1261.05 1454.53,1302.52 1457.02,1302.52 1457.71,1302.52 ccw(c1469.06,1349.16) 1493.32,1307.75 2256.92,1307.75 J5.4
DIO12_MISO: J5.5 J6.1 U2.16 | length 1700.7
  Top Layer w6: U2.16 1219.95,894.95 1219.95,1132.18 1317.06,1229.28 1317.06,1265.05 1352.99,1300.98 1420.87,1300.98 J6.1 2198.33,1349.16 J5.5
DIO13_SCK: J5.6 J6.2 LED5.1 U2.17 | length 2028.6
  Top Layer w6: U2.17 1204.58,887.7 1203.95,888.32 1203.95,1251.94 1249.17,1297.16 1317.06,1297.16 J6.2 1448.5,1428.61 2177.78,1428.61 J5.6 2242.82,1677.18 LED5.1
DTR: C8.2 U1.13 | length 3317.9
  Top Layer w6: v1(691.56,2473.86) 773.21,2555.51 C8.2 ; v1(737.58,2401.91) 1017.6,2121.89 v1(1017.6,2072.63) ; v1(1101.86,2068.09) 1403.89,2370.12 2158.92,2370.12 ccw(c2173.83,2415.74) 2173.83,2367.74 2590.94,2367.74 2609.81,2386.61 v1(2642.67,2386.61) ; v1(2738.77,2385.43) 2797.46,2385.43 2913.17,2501.15 2913.17,2894.13 2904.88,2902.42 U1.13
  Bottom Layer w6: v1(691.56,2473.86) 691.56,2447.93 v1(737.58,2401.91) ; v1(1017.6,2072.63) 1019.87,2070.36 1099.59,2070.36 v1(1101.86,2068.09) ; v1(2642.67,2386.61) 2643.17,2386.61 2658.12,2371.66 2722.14,2371.66 2735.9,2385.43 v1(2738.77,2385.43)
GND: C1.1 C2.1 C3.2 C4.1 C5.1 C6.2 C7.1 C9.2 C10.2 C11.2 D1.2 J2.1 J2.2 J2.3 J2.4 J2.5 J2.6 J2.7 J2.8 J5.7 J6.6 J7.1 J7.2 J7.3 J7.4 J7.5 J7.6 J8.1 J8.2 J8.3 J8.4 J8.5 J8.6 J8.7 J8.8 J8.9 J8.10 J9.1 J9.2 J9.3 J9.4 J9.5 J9.6 J9.7 J9.8 J10.6 J10.7 P1.2 P1.3 PS1.1 R1.2 R2.2 R3.2 R4.2 R6.2 R11.1 R12.2 SW2.4 TP1_JACK.2 TP2_USB.2 TP3_3V3.2 TP4_D+.2 TP5_D-.2 TP6_CHRX.2 TP7_CHTX.2 TP8_XTAL.2 TP9_XTAL.2 U1.1 U2.3 U2.5 U2.21 USB1.A1 USB1.A12 USB1.B1 USB1.B12 Y1.2 Y1.4 Y2.2 Y2.4 | length 2039.8
  Top Layer w6: SW2.4 575.24,2603.24 v1(575.24,2679.49) ; v1(667.35,2612.37) 667.35,2666.45 C9.2 ; C1.1@682.17,3152.43 v1(735.46,3152.43) ; R1.2@766.66,2995.62 v1(824.46,2995.62) ; v1(828.87,775.52) 904.6,775.52 C10.2 ; v1(1122.99,677.37) 1201.62,677.37 U2.21 ; PS1.1@1124.4,3036.1 v1@1183.85,3036.1 ; v1@1268.93,2979.76 C2.1@1268.93,3045.4 ; v1@1379.81,2817.14 R2.2@1379.81,2878.67 ; R4.2 1419.21,3274.63 v1(1476.16,3274.63) ; U2.3 1530.08,647.83 v1(1601.9,647.83) ; U2.5 1530.08,713.83 v1(1610.75,713.83) ; R3.2 1565.04,2708.05 v1(1565.04,2628.16) ; v1@1568.78,894.46 Y2.4@1639.1,894.46 ; USB1.B1 1682.78,3095.05 1694.59,3083.24 USB1.A12 1694.25,3075.02 1694.25,3029.07 v1(1693.91,3028.73) ; C7.1@1691.17,1074.11 v1@1737.25,1074.11 ; Y2.2 1707.19,986.18 1747.01,1025.99 1764.16,1025.99 v1(1767.79,1029.62) ; C11.2 1734.84,745.65 v1(1774.96,745.65) ; C6.2 v1@1797.52,973.98 ; v1(1895.67,3028.55) 1895.67,3032.29 1911.12,3047.74 USB1.A1 1911.12,3083.24 1922.94,3095.05 USB1.B12 ; v1(2004.04,2979.84) 2068.15,2979.84 D1.2 ; v1(2020.87,1673.51) 2069.42,1673.51 R6.2 ; v1(2087.17,3387.52) 2087.17,3319.92 R12.2 ; R11.1 2185.98,3113.63 v1(2185.98,3059.23) ; v1(2268.22,2772.4) 2353.85,2772.4 Y1.2 ; v1(2346.87,2843.53) 2406.91,2843.53 C4.1 ; C5.1 2397.39,2605.12 v1(2449.73,2605.12) ; Y1.4 2443.76,2702.18 v1(2497.59,2702.18) ; v1(2491.85,3051.14) 2492.49,3051.78 2575.36,3051.78 U1.1 ; C3.2 2881.8,3169.82 v1(2945.27,3169.82)
  Top Layer w10: C1.1 C1.1@682.17,3152.43 ; R1.2 R1.2@766.66,2995.62
  Top Layer w20: PS1.1 PS1.1@1124.4,3036.1 ; v1@1183.85,3036.1 v1(1184.34,3035.61) ; v1(1268.11,2978.94) v1@1268.93,2979.76 ; C2.1@1268.93,3045.4 C2.1 ; v1(1378.99,2816.32) v1@1379.81,2817.14 ; R2.2@1379.81,2878.67 R2.2 ; v1(1567.82,893.51) v1@1568.78,894.46 ; Y2.4@1639.1,894.46 Y2.4 ; C7.1 C7.1@1691.17,1074.11 ; v1@1737.25,1074.11 v1(1737.66,1074.52) ; v1@1797.52,973.98 1799.73,976.18 v1(1799.73,977.53)
JACK_5V: C1.2 J10.8 LED1.1 P1.1 SW1.3 TP1_JACK.1 | length 3037.2
  Top Layer w20: v1(357.87,1406.51) 357.54,1406.84 357.54,2588.89 TP1_JACK.1 256.12,2916.41 P1.1 391.89,2916.9 532.66,3057.66 LED1.1 605.34,3057.7 605.34,3150.32 C1.2 605.3,3159.22 831.29,3385.2 SW1.3 ; v1(398.84,1337.97) 397.89,1337.03 397.89,1145.63 J10.8
  Bottom Layer w20: v1(357.87,1406.51) 397.88,1366.5 397.88,1338.93 v1(398.84,1337.97)
NC: J10.1 J10.2
NetC4_2: C4.2 R13.1 U1.7 Y1.1 | length 493.4
  Top Layer w6: C4.2 2448.33,2774.73 Y1.1 2527.48,2769.63 2544.69,2752.42 U1.7 2607.31,2752.42 2632.31,2727.42 2632.31,2668 2581.33,2617.03 R13.1
NetC5_2: C5.2 R13.2 TP8_XTAL.1 U1.8 Y1.3 | length 1403.4
  Top Layer w6: TP8_XTAL.1 2151.51,2470.18 2156.19,2465.5 2157.95,2463.74 2173.83,2463.74 2236.06,2463.74 2240.57,2459.23 v1(2307.53,2459.23) ; v1(2307.78,2517.45) 2307.78,2557.02 C5.2@2355.97,2605.21 ; Y1.3 2355.97,2702.06 C5.2@2355.97,2609.15 ; C5.2@2362.62,2610.3 C5.2@2362.99,2610.66 ; R13.2 2458.54,2544.54 2366.49,2544.54 2355.97,2555.06 C5.2@2355.97,2605.21 ; U1.8 2576,2669.13 2564.42,2657.54 2376.88,2657.54 2370.53,2651.19 2370.53,2623.7 C5.2@2355.97,2609.15 ; C5.2@2355.97,2605.21 C5.2@2355.97,2609.15
  Bottom Layer w6: v1(2307.53,2459.23) 2307.66,2459.36 2307.66,2517.33 v1(2307.78,2517.45)
NetC6_1: C6.1 R14.1 U2.7 Y2.1 | length 451.1
  Top Layer w6: U2.7 1590.83,775.33 1707.19,891.69 Y2.1 1709.3,893.52 C6.1 1803.51,887.53 R14.1
NetC7_2: C7.2 R14.2 TP9_XTAL.1 U2.8 Y2.3 | length 1212.9
  Top Layer w6: U2.8 1528.58,906.53 1604.3,982.25 Y2.3 Y2.3@1640.27,986.18 ; C7.2 1651.39,1071.73 1640.27,1060.6 Y2.3@1640.27,986.18 ; TP9_XTAL.1 2101.37,633.56 2022.23,633.56 2018.71,637.08 2018.71,984.28 1997.45,1005.53 R14.2 1910.68,1005.53 1861.09,1055.12 1757.23,1055.12 1749.02,1046.92 1701,1046.92 Y2.3@1640.27,986.18
NetC10_1: C10.1 FB1.2 U2.18 | length 225.2
  Top Layer w6: C10.1 1075.54,775.38 FB1.2 1204.34,775.1 U2.18
NetJ3_1: J3.1 R7.2 | length 190
  Top Layer w6: R7.2 2238.44,317.18 J3.1
NetJ3_2: J3.2 R8.2 | length 178.7
  Top Layer w6: R8.2 2249.94,417.18 J3.2
NetLED1_2: LED1.2 R1.1 | length 83.4
  Top Layer w6: LED1.2 R1.1@688.59,2998.61
  Top Layer w10: R1.1@688.59,2998.61 R1.1
NetLED2_2: LED2.2 R2.1 | length 107.4
  Top Layer w6: R2.1@1380.22,2954.71 LED2.2@1380.22,3060.9
  Top Layer w20: LED2.2 LED2.2@1380.22,3060.9 ; R2.1@1380.22,2954.71 R2.1
NetLED3_2: LED3.2 R3.1 | length 56.7
  Top Layer w6: R3.1 1563.8,2802.89 LED3.2
NetLED4_2: LED4.2 R4.1 | length 89.1
  Top Layer w6: LED4.2 1377.09,3277.39 R4.1
NetLED5_2: LED5.2 R6.1 | length 74.1
  Top Layer w6: R6.1 2181.33,1674.74 LED5.2
NetLED6_2: LED6.2 R9.1 | length 74.5
  Top Layer w6: R9.1 LED6.2 LED6.2@2436.8,3126.23
NetLED7_2: LED7.2 R10.1 | length 66.4
  Top Layer w6: R10.1 2309.53,3123.54 2309.44,3123.62 LED7.2
NetR11_2: R11.2 USB1.A5 | length 485.3
  Top Layer w6: USB1.A5 1832.38,3049.73 1852.59,3029.52 1852.59,2994.44 1886.22,2960.81 1926.33,2960.81 1992.59,3027.07 2000.19,3027.07 2040.93,3067.82 2140.43,3067.82 2143.95,3071.34 R11.2
NetR12_1: R12.1 USB1.B5 | length 373.9
  Top Layer w6: USB1.B5 1897.24,3272.51 2044.38,3272.51 2047.89,3276.02 R12.1
RST: C8.1 C9.1 J6.3 J10.3 R5.2 SW2.1 U2.29 | length 5055.7
  Top Layer w6: R5.2 773.21,2781.6 C8.1 773.02,2706.18 C9.1 488.53,2706.18 403.61,2621.27 403.61,2379.16 414.01,2368.77 435.34,2368.77 455.97,2348.15 SW2.1 455.97,1587.56 J10.3 ; J6.3 805.2,1349.16 697.37,1457 628.81,1517.18 J10.3 ; U2.29 1375.58,527.33 1375.58,491.1 1116.18,231.7 310.35,231.7 306.84,235.21 306.84,1297.67 J10.3
USB_5V: LED3.1 SW1.1 TP2_USB.1 USB1.A4 USB1.A9 USB1.B4 USB1.B9 | length 2118.9
  Top Layer w6: SW1.1 1227.87,3385.44 1538.86,3385.44 1542.38,3381.93 1542.38,2984.25 1565.56,2961.07 ; LED3.1 1565.55,2961.06 ; USB1.B4 1754.42,3117.87 1754.42,3076.14 USB1.A9 1753.64,3021.46 1722.46,2990.28 ; v1(1785.41,2958.77) 1727.43,2990.28 1722.46,2990.28 ; USB1.B9 1850.1,3098.25 1851.29,3097.06 1851.29,3076.14 USB1.A4 1852.07,3052.67 1868.59,3036.15 1868.59,3019.57 1885.1,3003.05 ; v1(1896.78,2986.31) 1896.78,2991.38 1885.1,3003.05 ; TP2_USB.1 2058.51,3083.82 2034.31,3083.82 1993.56,3043.07 1985.97,3043.07 1945.94,3003.05 1885.1,3003.05 ; 1565.56,2961.07 1567.53,2959.1 1691.28,2959.1 1722.46,2990.28
  Bottom Layer w6: v1(1785.41,2958.77) 1869.24,2958.77 v1(1896.78,2986.31)
VCC_5V: C3.1 C11.1 D1.5 FB1.1 J6.4 J10.5 LED4.1 LED6.1 LED7.1 PS1.3 R5.1 SW1.2 U1.16 U2.4 U2.6 | length 11307.4
  Top Layer w6: R5.1 772.16,2874.21 849.96,2952.01 849.96,3038.65 827.4,3061.21 827.4,3193.98 917.38,3283.95 1026.38,3283.95 SW1.2 1127.63,3379.65 LED4.1 ; FB1.1 1075.81,919.94 1076.18,920.31 v1(1166.83,1010.96) ; v1(1275.39,1012.34) 1275.39,1055.5 J6.4 ; C3.1 C3.1@2810,3166.82
  Top Layer w20: v1(369.43,170.37) 1491.63,170.37 1621.71,300.46 1621.71,302.42 v1(1752.75,433.46) ; v1@370.46,274.16 370.46,924.86 382.17,936.58 597.16,936.58 612.01,951.43 612.01,1231.83 J10.5@526.72,1317.13 ; J10.5 577.83,1368.66 v1(737.08,1368.66) ; J10.5@526.4,1317.13 J10.5@526.72,1317.13 ; v1(761.16,1440.74) 1061,1740.59 1061,2582.53 1072.72,2594.25 1231.62,2594.25 ; 1076.18,920.31 1076.18,1305.41 1064.47,1317.13 J10.5@526.72,1317.13 ; SW1.2@1127.63,3379.65 1127.63,3222.32 PS1.3 1405.09,3218.59 1486.24,3137.45 1486.24,2848.87 1231.62,2594.25 ; C11.1 1658.14,746.33 1597.29,746.33 1594.29,743.33 U2.6 1486.26,743.33 1453.32,710.39 1453.32,693.82 1466.82,680.33 1631.87,680.33 v1(1746.93,565.27) ; D1.5 2220.05,2980.83 2231.76,2969.11 ; C3.1 2806.85,3175.67 2797.17,3185.35 LED6.1 2435.44,3184.06 2310.82,3184.06 LED7.1 2243.62,3182.76 2231.76,3170.91 2231.76,2969.11 ; U1.16 C3.1@2810,3166.82 ; 1231.62,2594.25 1620.7,2594.25 1889.95,2863.5 2220.05,2863.5 2231.76,2875.21 2231.76,2969.11
  Bottom Layer w6: v1(1166.83,1010.96) 1167.52,1011.65 1274.7,1011.65 v1(1275.39,1012.34)
  Bottom Layer w20: v1(369.43,170.37) 369.94,170.89 369.94,273.33 v1(370.46,273.84) ; v1(737.08,1368.66) 737.08,1415.31 761.16,1439.39 v1(761.16,1440.74) ; v1(1746.93,565.27) 1746.93,563.92 1752.75,558.09 v1(1752.75,433.46)
pads on no net: D1.1 D1.3 SW2.2 SW2.3 U1.4 U1.9 U1.10 U1.11 U1.12 U1.14 U1.15 U2.19 U2.22 USB1. USB1.A2 USB1.A3 USB1.A8 USB1.A10 USB1.A11 USB1.B2 USB1.B3 USB1.B8 USB1.B10 USB1.B11 USB1.EH

## Polygon pours and split planes (outlines as drawn)
GND on Bottom Layer "GND_L02_P000" (solid, pour order 0): 0,0 3000,0 3000,3500 0,3500

## Keep-outs
Keep-Out Layer:
  the board outline again, w20

## Silkscreen, mask and mechanical layers (free items; w line width, h text height)
Top Overlay:
  text "Taher Ujjainwala" at 1316.32,2182.17 h60
  text "brd3_2022_03_31_v2" at 1188.93,2088.79 h60
  text "CU Boulder" at 1514.36,1782.69 h60
  text "ECEN 5730" at 1380.55,1653.49 h60
  text "GOLDEN ARDUINO V2 - TYPE C" at 116.27,57 h60

## Text inside footprints (layer, text, board x,y; h text height)
J2: Top Overlay "GND" at 2796.27,1018.67 h30 r320.63; Top Overlay "GND" at 2793.38,910.05 h30 r319.4; Top Overlay "GND" at 2794.82,815.9 h30 r320; Top Overlay "GND" at 2794.82,711.62 h30 r320.19; Top Overlay "GND" at 2794.82,609.52 h30 r319.94; Top Overlay "GND" at 2792.65,509.58 h30 r320.19; Top Overlay "GND" at 2792.65,416.16 h30 r323.63; Top Overlay "GND" at 2795.31,320.1 h30 r322.91
J3: Top Overlay "RX" at 2313.16,297.79 h30 r359; Top Overlay "TX" at 2309.5,399.89 h30; Top Overlay "2" at 2335.18,504.76 h30 r1.78; Top Overlay "~3" at 2308.78,598.21 h30 r359.08; Top Overlay "4" at 2338.75,708.79 h30 r357.91; Top Overlay "~5" at 2314.49,802.95 h30 r1.71; Top Overlay "~6" at 2306.64,902.12 h30 r357.02; Top Overlay "7" at 2332.33,1004.84 h30 r356.87
J4: Top Overlay "A1" at 588.94,701.78 h30 r359.23; Top Overlay "A0" at 593.95,801.84 h30 r1.23; Top Overlay "A2" at 590.95,605.72 h30 r358.55; Top Overlay "A3" at 590.95,502.65 h30 r359.33; Top Overlay "A4_SDA" at 590.95,395.58 h30 r359.53; Top Overlay "A5_SCL" at 593.17,292.17 h30 r0.19
J5: Top Overlay "SCL" at 2275.25,2064.94 h30 r359; Top Overlay "SDA" at 2275.25,1965.06 h30 r0.7; Top Overlay "AREF" at 2254.57,1857.34 h30 r1.5; Top Overlay "GND" at 2287.38,1763.89 h30 r359.51; Top Overlay "13" at 2296.66,1659.02 h30 r1.15; Top Overlay "12" at 2314.49,1564.85 h30 r1.34; Top Overlay "~11" at 2295.94,1458.56 h30 r359.24; Top Overlay "~10" at 2286.67,1356.54 h30 r0.67; Top Overlay "~9" at 2311.64,1262.38 h30 r1.57; Top Overlay "8" at 2337.32,1158.94 h30 r2.26
J7: Top Overlay "GND" at 96.35,727.18 h30 r315; Top Overlay "GND" at 96.35,827.18 h30 r315; Top Overlay "GND" at 93.42,627.18 h30 r315; Top Overlay "GND" at 93.42,527.18 h30 r315; Top Overlay "GND" at 93.42,427.18 h30 r315; Top Overlay "GND" at 93.42,327.18 h30 r315
J8: Top Overlay "GND" at 2798.37,1173.15 h30 r318.66; Top Overlay "GND" at 2799.44,1272.34 h30 r321.33; Top Overlay "GND" at 2802.64,1377.94 h30 r320.65; Top Overlay "GND" at 2805.84,1472.87 h30 r318.13; Top Overlay "GND" at 2799.44,1574.2 h30 r315.07; Top Overlay "GND" at 2799.44,1673.4 h30 r320.93; Top Overlay "GND" at 2804.77,1774.73 h30 r323.39; Top Overlay "GND" at 2805.84,1877.12 h30 r324.65; Top Overlay "GND" at 2796.96,1973.27 h30 r325.16; Top Overlay "GND" at 2788.96,2074.67 h30 r321.29
J9: Top Overlay "GND" at 97.6,1760.06 h30 r315; Top Overlay "GND" at 69.95,1674.1 h30 r315; Top Overlay "GND" at 94.16,1554.23 h30 r315; Top Overlay "GND" at 99.01,1456.16 h30 r315; Top Overlay "GND" at 105.06,1358.08 h30 r315; Top Overlay "GND" at 91.74,1252.74 h30 r315; Top Overlay "GND" at 92.62,1154.07 h30 r315; Top Overlay "GND" at 91.74,1049.33 h30 r315
J10: Top Overlay "NC" at 597.84,1708.32 h30 r1.9; Top Overlay "NC" at 594.22,1611.14 h30 r2.16; Top Overlay "RESET" at 591.8,1509.43 h30 r359.82; Top Overlay "3v3" at 594.22,1402.88 h30 r0.1; Top Overlay "5v" at 589.37,1310.86 h30 r359.28; Top Overlay "GND" at 591.8,1200.68 h30; Top Overlay "GND" at 586.95,1106.24 h30 r357.67; Top Overlay "Vin" at 591.8,1003.32 h30 r358.54